# EAGLE board IF amplifier MC1350 (EAGLE 9.1.2)
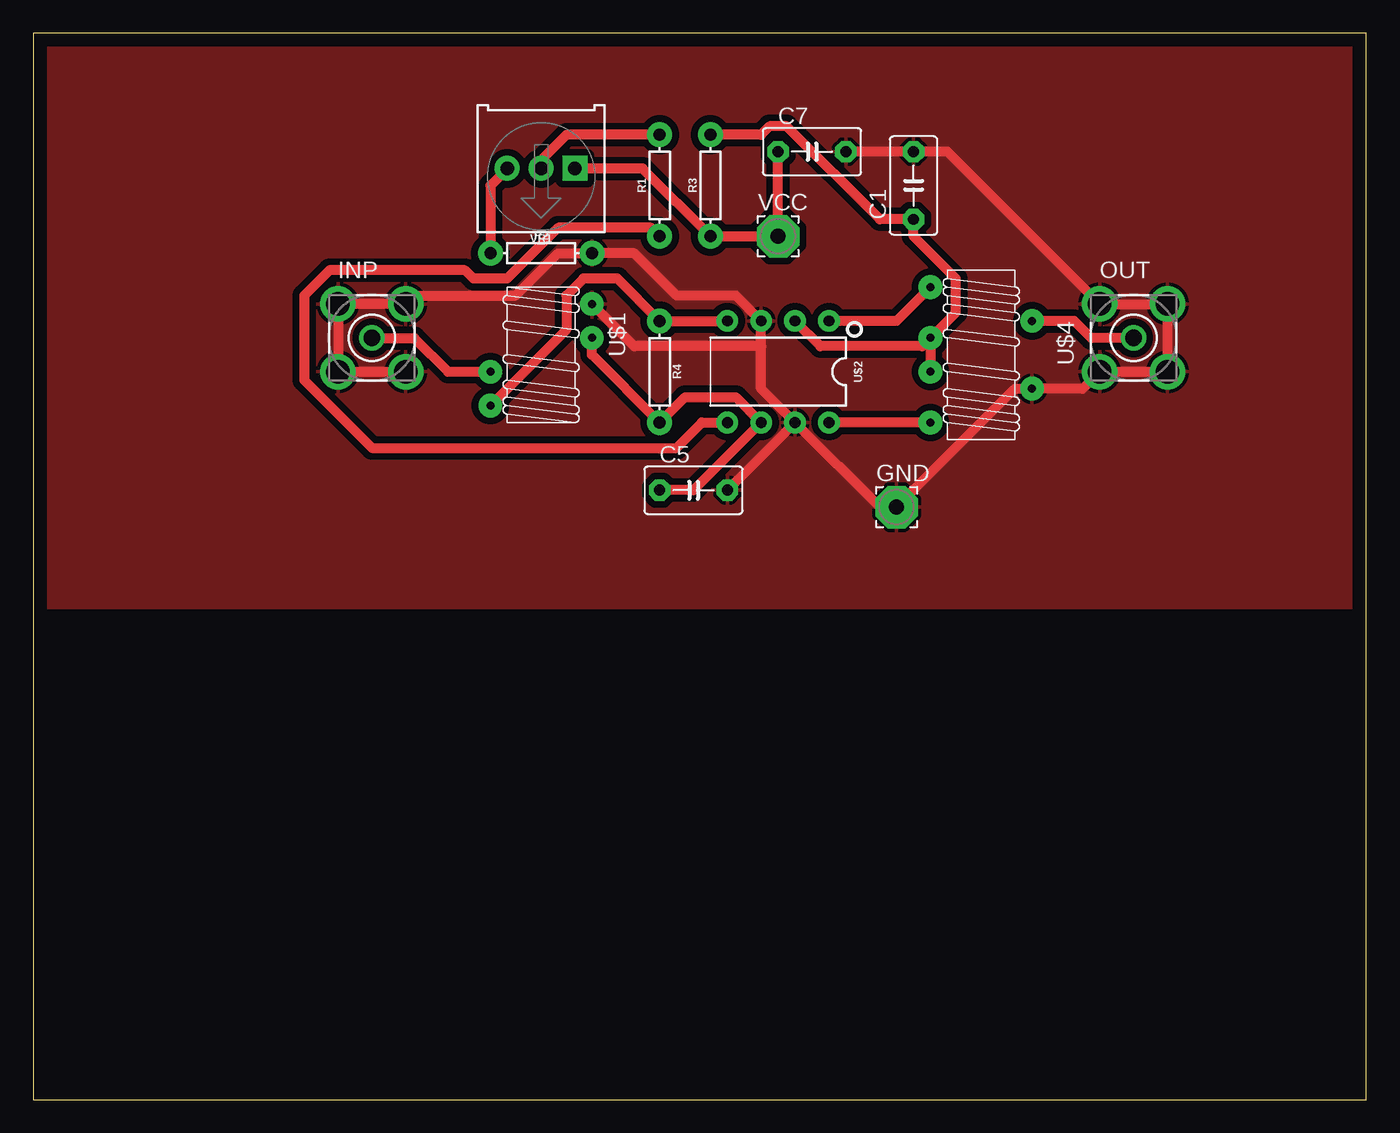
[diagram p0: board, top side]

Size 100 x 80 mm. Coordinates in mm from the lower left corner, seen from the top.
Outline: 0,0 100,0 100,80 0,80 0,0
Copper layers (1*16): Top 0.035mm / dielectric 1.5mm / Bottom 0.035mm
Design rules "default": minimum track width 6mil, minimum drill 0.35mm, track to track 6mil, track to pad 6mil, pad to pad 6mil, via to via 6mil, smd to smd 6mil, copper to edge 40mil, drill to drill 6mil, minimum pad ring 10mil, minimum via ring 8mil, stop-mask expansion 4mil, vias tented up to drill 0mil, thermal gap 10mil
Net classes: 0 default: width 0.762 mm, drill 0.762 mm, clearance 0.508 mm

## Footprints (pad centres in the part's own frame; a part is rotated, then mirrored left to right if it is on the bottom)
C5B3.5 = drill 0.813 pad 1.6 octagon: 1 -2.54,0; 2 2.54,0
3,17/1,1 = drill 1.118 pad 3.175 octagon: 1 0,0
BU-SMA-V = drill 1.27: 1 0,0 | drill 1.778: 2 -2.55,2.55; 3 2.55,2.55; 4 2.55,-2.55; 5 -2.55,-2.55
AXIAL-0.3 = drill 0.9 pad 1.88: P$1 -3.81,0; P$2 3.81,0
T37_TRANSFORMER = drill 0.6 pad 1.778: C1A -3.81,-3.81; C1B 3.81,1.27; C2A -3.81,-1.27; C2B 3.81,3.81
DIP8 = drill 0.813 pad 1.626: 1 -7.62,-2.54; 2 -5.08,-2.54; 3 -2.54,-2.54; 4 0,-2.54; 5 0,5.08; 6 -2.54,5.08; 7 -5.08,5.08; 8 -7.62,5.08
T50_SPLITTER = drill 0.6 pad 1.778: C1A -1.27,-5.08; C1B -1.27,0; C2A 6.35,-3.81; C2B 6.35,-7.62; C3A 6.35,-1.27; C3B 6.35,2.54
TRIMPOT-PTH-3386U = drill 1.016 pad 1.88 square: 1 -2.54,-0.015 | drill 1.016 pad 1.88: 2 0,-0.015; 3 2.54,-0.015

## Placement (x,y rotation side)
C1  .1uF  [C5B3.5]  66.04,68.58 90 top
C5  .1uF  [C5B3.5]  49.53,45.72 0 top
C7  100uF  [C5B3.5]  58.42,71.12 0 top
GND  [3,17/1,1]  64.77,44.45 0 top
INP  BU-SMA-V  [BU-SMA-V]  25.4,57.15 0 top
OUT  BU-SMA-V  [BU-SMA-V]  82.55,57.15 0 top
R1  10k  [AXIAL-0.3]  46.99,68.58 90 top
R2  4.7k  [AXIAL-0.3]  38.1,63.5 0 top
R3  82  [AXIAL-0.3]  50.8,68.58 90 top
R4  RINPUT  [AXIAL-0.3]  46.99,54.61 270 top
U$1  T37_TRANSFORMER  [T37_TRANSFORMER]  38.1,55.88 180 top
U$2  MC1350  [DIP8]  52.07,55.88 180 top
U$4  T50_SPLITTER  [T50_SPLITTER]  73.66,53.34 180 top
VCC  [3,17/1,1]  55.88,64.77 0 top
VR1  10k  [TRIMPOT-PTH-3386U]  38.1,69.85 180 top

## Library data of the parts
C1 C5 C7 = capacitor-wima
GND VCC = wirepad
INP OUT = con-coax; OC_FARNELL: unknown; OC_NEWARK: unknown
R1-R4 = SparkFun-Resistors; PROD_ID: RES-12182
U$1 U$4 = toroid
U$2 = SparkFun-IC-Microcontroller
VR1 = SparkFun-Resistors; PROD_ID: RES-09730; SF_SKU: COM-09806

## Nets
GND: C1.2 C5.2 C7.2 GND.1 INP.2 INP.3 INP.4 INP.5 OUT.2 OUT.3 OUT.4 OUT.5 R2.P$2 U$1.C1A U$2.3 U$2.7 U$4.C1B
N$1: R4.P$1 U$1.C2B U$2.4
N$2: U$2.1 U$4.C2B
N$3: R2.P$1 VR1.3
N$4: OUT.1 U$4.C1A
N$5: C1.1 R3.P$2 U$2.2 U$4.C2A U$4.C3A
N$6: U$2.8 U$4.C3B
N$7: C5.1 R4.P$2 U$1.C2A U$2.6
N$8: INP.1 U$1.C1B
N$11: R1.P$1 U$2.5
N$12: R1.P$2 VR1.2
VCC: C7.1 R3.P$1 VCC.1 VR1.1

## Tracks (layer width: path | path; a pad name or v marks a point on that pad's centre or on a via)
GND
  Top 0.762: OUT.4 OUT.5 79.38,53.98 78.74,53.34 U$4.C1B 73.66,53.34 GND.1 63.5,44.45 U$2.7 | OUT.4 | C7.2 C1.2 68.58,71.12 79.38,60.33 OUT.2 OUT.3 | OUT.3 | OUT.3 OUT.4 | INP.2 INP.5 | INP.5 | INP.2 | INP.5 INP.4 | INP.2 INP.3 28.57,60.33 36.2,60.33 39.37,63.5 R2.P$2 45.09,63.5 48.26,60.33 52.7,60.33 U$2.3 54.61,56.52 | U$2.7 C5.2 | 54.61,56.52 54.61,53.34 U$2.7 | U$1.C1A 45.09,56.52 54.61,56.52
  pour Top: 0,80.01 100.33,80.01 100.33,36.83 0,36.83
N$1
  Top 0.762: U$2.4 R4.P$1 43.81,61.59 41.27,61.59 40.01,60.33 40.01,57.78 U$1.C2B
N$2
  Top 0.762: U$2.1 64.77,58.42 U$4.C2B
N$3
  Top 0.762: R2.P$1 34.29,68.58 VR1.3
N$4
  Top 0.762: U$4.C1A 78.11,58.42 79.38,57.15 OUT.1
N$5
  Top 0.762: U$4.C2A 69.22,59.05 69.22,61.59 66.04,64.77 C1.1 63.5,66.04 56.52,73.03 55.24,73.03 54.61,72.39 R3.P$2 | U$2.2 59.05,56.52 66.67,56.52 U$4.C2A | U$4.C2A U$4.C3A
N$6
  Top 0.762: U$4.C3B U$2.8
N$7
  Top 0.762: C5.1 49.53,45.72 U$2.6 52.7,52.7 48.9,52.7 R4.P$2 41.91,55.88 U$1.C2A
N$8
  Top 0.762: U$1.C1B 31.11,54.61 28.57,57.15 INP.1
N$11
  Top 0.762: U$2.5 50.16,50.8 48.26,48.9 25.4,48.9 20.32,53.98 20.32,60.33 22.23,62.23 32.38,62.23 33.02,61.59 35.56,61.59 39.37,65.41 46.35,65.41 R1.P$1
N$12
  Top 0.762: R1.P$2 40.01,72.39 38.1,70.48 VR1.2
VCC
  Top 0.762: C7.1 VCC.1 R3.P$1 45.72,69.85 VR1.1